# EAGLE board Wearable Incontinence monitoring system (EAGLE 9.7.0)

Size 210.78 x 125.5 mm. Coordinates in mm from the lower left corner, seen from the top.
Outline: 0,0 210.78,0 210.78,125.5 0,125.5 0,0
Copper layers (1*16): Top 0.035mm / dielectric 1.5mm / Bottom 0.035mm
Design rules "default": minimum track width 6mil, minimum drill 0.35mm, track to track 6mil, track to pad 6mil, pad to pad 6mil, via to via 6mil, smd to smd 6mil, copper to edge 40mil, drill to drill 6mil, minimum pad ring 10mil, minimum via ring 8mil, stop-mask expansion 4mil, vias tented up to drill 0mil, thermal gap 10mil

## Footprints (pad centres in the part's own frame; a part is rotated, then mirrored left to right if it is on the bottom)
LEDRD254W60D565H860B_Y = drill 0.981 pad 1.581: 1 -1.27,0; 2 1.27,0
PIEZO = drill 1 pad 1.6: 1 -3.5,0; 2 3.5,0
RESAD1016W63L850D250B = drill 0.83 pad 1.43: 1 -5.08,0; 2 5.08,0
HA-06-SM065 = drill 1 pad 1.676: 1 -2.54,-2.54; 2 0,2.54; 3 2.54,-2.54
ARDUINO-UNO-R3-SHIELD = drill 1.016 pad 1.88: 3.3V 24.13,-2.54; 5V 24.13,0; A0 24.13,12.7; A1 24.13,15.24; A2 24.13,17.78; A3 24.13,20.32; A4 24.13,22.86; A5 24.13,25.4; AREF -24.13,-13.97; D2 -24.13,20.32; D3 -24.13,17.78; D4 -24.13,15.24; D5 -24.13,12.7; D6 -24.13,10.16; D7 -24.13,7.62; D8 -24.13,3.81; D9 -24.13,1.27; D10 -24.13,-1.27; D11 -24.13,-3.81; D12 -24.13,-6.35; D13 -24.13,-8.89; GND@0 24.13,2.54; GND@1 24.13,5.08; GND@2 -24.13,-11.43; IOREF 24.13,-7.62; NC 24.13,-10.16; RES 24.13,-5.08; RX -24.13,25.4; SCL -24.13,-19.05; SDA -24.13,-16.51; TX -24.13,22.86; VIN 24.13,7.62
JHD-162A = drill 1.016 long: 1 -19.05,0; 2 -16.51,0; 3 -13.97,0; 4 -11.43,0; 5 -8.89,0; 6 -6.35,0; 7 -3.81,0; 8 -1.27,0; 9 1.27,0; 10 3.81,0; 11 6.35,0; 12 8.89,0; 13 11.43,0; 14 13.97,0; 15 16.51,0; 16 19.05,0

## Placement (x,y rotation side)
DLED  YELLOW  [LEDRD254W60D565H860B_Y]  60.94,36.44 180 top
PIEZO1  PIEZO  [PIEZO]  12.68,13.58 0 top
R1  220  [RESAD1016W63L850D250B]  6.33,44.06 90 top
RPOT2ND_POTENTIOMETER1  10k  [HA-06-SM065]  26.65,41.52 0 top
RPOTPOTENTIOMETER1  10k  [HA-06-SM065]  44.43,13.58 0 top
RRESISTOR  220  [RESAD1016W63L850D250B]  62.21,28.82 90 top
U1X_ARDUINO_UNO_R3  ARDUINO-UNO-R3-SHIELD  [ARDUINO-UNO-R3-SHIELD]  176.27,62.38 270 top
ULCD_DISPLAY  LCD-16X2JHD-162A  [JHD-162A]  33.28,117.96 0 top

## Library data of the parts
DLED = Tinkercad; CATEGORY: Opto-Electronic; SUB-CATEGORY: LED; VALUE: LED_YELLOW
PIEZO1 R1 RPOT2ND_POTENTIOMETER1 RPOTPOTENTIOMETER1 RRESISTOR U1X_ARDUINO_UNO_R3 ULCD_DISPLAY = Tinkercad

## Nets
DLED_A: DLED.1 RRESISTOR.2
U1X_ARDUINO_UNO_R3_5V: R1.2 RPOT2ND_POTENTIOMETER1.1 RPOTPOTENTIOMETER1.3 U1X_ARDUINO_UNO_R3.5V ULCD_DISPLAY.2
U1X_ARDUINO_UNO_R3_A0: RPOT2ND_POTENTIOMETER1.2 U1X_ARDUINO_UNO_R3.A0
U1X_ARDUINO_UNO_R3_D2: U1X_ARDUINO_UNO_R3.D2 ULCD_DISPLAY.14
U1X_ARDUINO_UNO_R3_D3: U1X_ARDUINO_UNO_R3.D3 ULCD_DISPLAY.13
U1X_ARDUINO_UNO_R3_D4: U1X_ARDUINO_UNO_R3.D4 ULCD_DISPLAY.12
U1X_ARDUINO_UNO_R3_D5: U1X_ARDUINO_UNO_R3.D5 ULCD_DISPLAY.11
U1X_ARDUINO_UNO_R3_D6: U1X_ARDUINO_UNO_R3.D6 ULCD_DISPLAY.6
U1X_ARDUINO_UNO_R3_D7: U1X_ARDUINO_UNO_R3.D7 ULCD_DISPLAY.4
U1X_ARDUINO_UNO_R3_D8: RRESISTOR.1 U1X_ARDUINO_UNO_R3.D8
U1X_ARDUINO_UNO_R3_D9: PIEZO1.1 U1X_ARDUINO_UNO_R3.D9
U1X_ARDUINO_UNO_R3_GND: DLED.2 PIEZO1.2 RPOT2ND_POTENTIOMETER1.3 RPOTPOTENTIOMETER1.1 U1X_ARDUINO_UNO_R3.GND@0 U1X_ARDUINO_UNO_R3.GND@1 U1X_ARDUINO_UNO_R3.GND@2 ULCD_DISPLAY.1 ULCD_DISPLAY.5 ULCD_DISPLAY.16
ULCD_DISPLAY_LED+: R1.1 ULCD_DISPLAY.15
ULCD_DISPLAY_VO: RPOTPOTENTIOMETER1.2 ULCD_DISPLAY.3

## Tracks (layer width: path | path; a pad name or v marks a point on that pad's centre or on a via)
DLED_A  (1 unrouted)
U1X_ARDUINO_UNO_R3_5V  (4 unrouted)
U1X_ARDUINO_UNO_R3_A0  (1 unrouted)
U1X_ARDUINO_UNO_R3_D2  (1 unrouted)
U1X_ARDUINO_UNO_R3_D3  (1 unrouted)
U1X_ARDUINO_UNO_R3_D4  (1 unrouted)
U1X_ARDUINO_UNO_R3_D5  (1 unrouted)
U1X_ARDUINO_UNO_R3_D6  (1 unrouted)
U1X_ARDUINO_UNO_R3_D7  (1 unrouted)
U1X_ARDUINO_UNO_R3_D8  (1 unrouted)
U1X_ARDUINO_UNO_R3_D9  (1 unrouted)
U1X_ARDUINO_UNO_R3_GND  (9 unrouted)
ULCD_DISPLAY_LED+  (1 unrouted)
ULCD_DISPLAY_VO  (1 unrouted)